# Altium PCB MultiSpikeHoldPCB2.PcbDoc
Units mm, origin at the board's own origin, x right, y up, seen from the top; angles counter-clockwise.
Board outline 89.1 x 92.94 mm, 2 copper layers (Top Layer, Bottom Layer), stack 0.071 mm thick; 1 components, 41 nets, 104 pads, 4 vias.
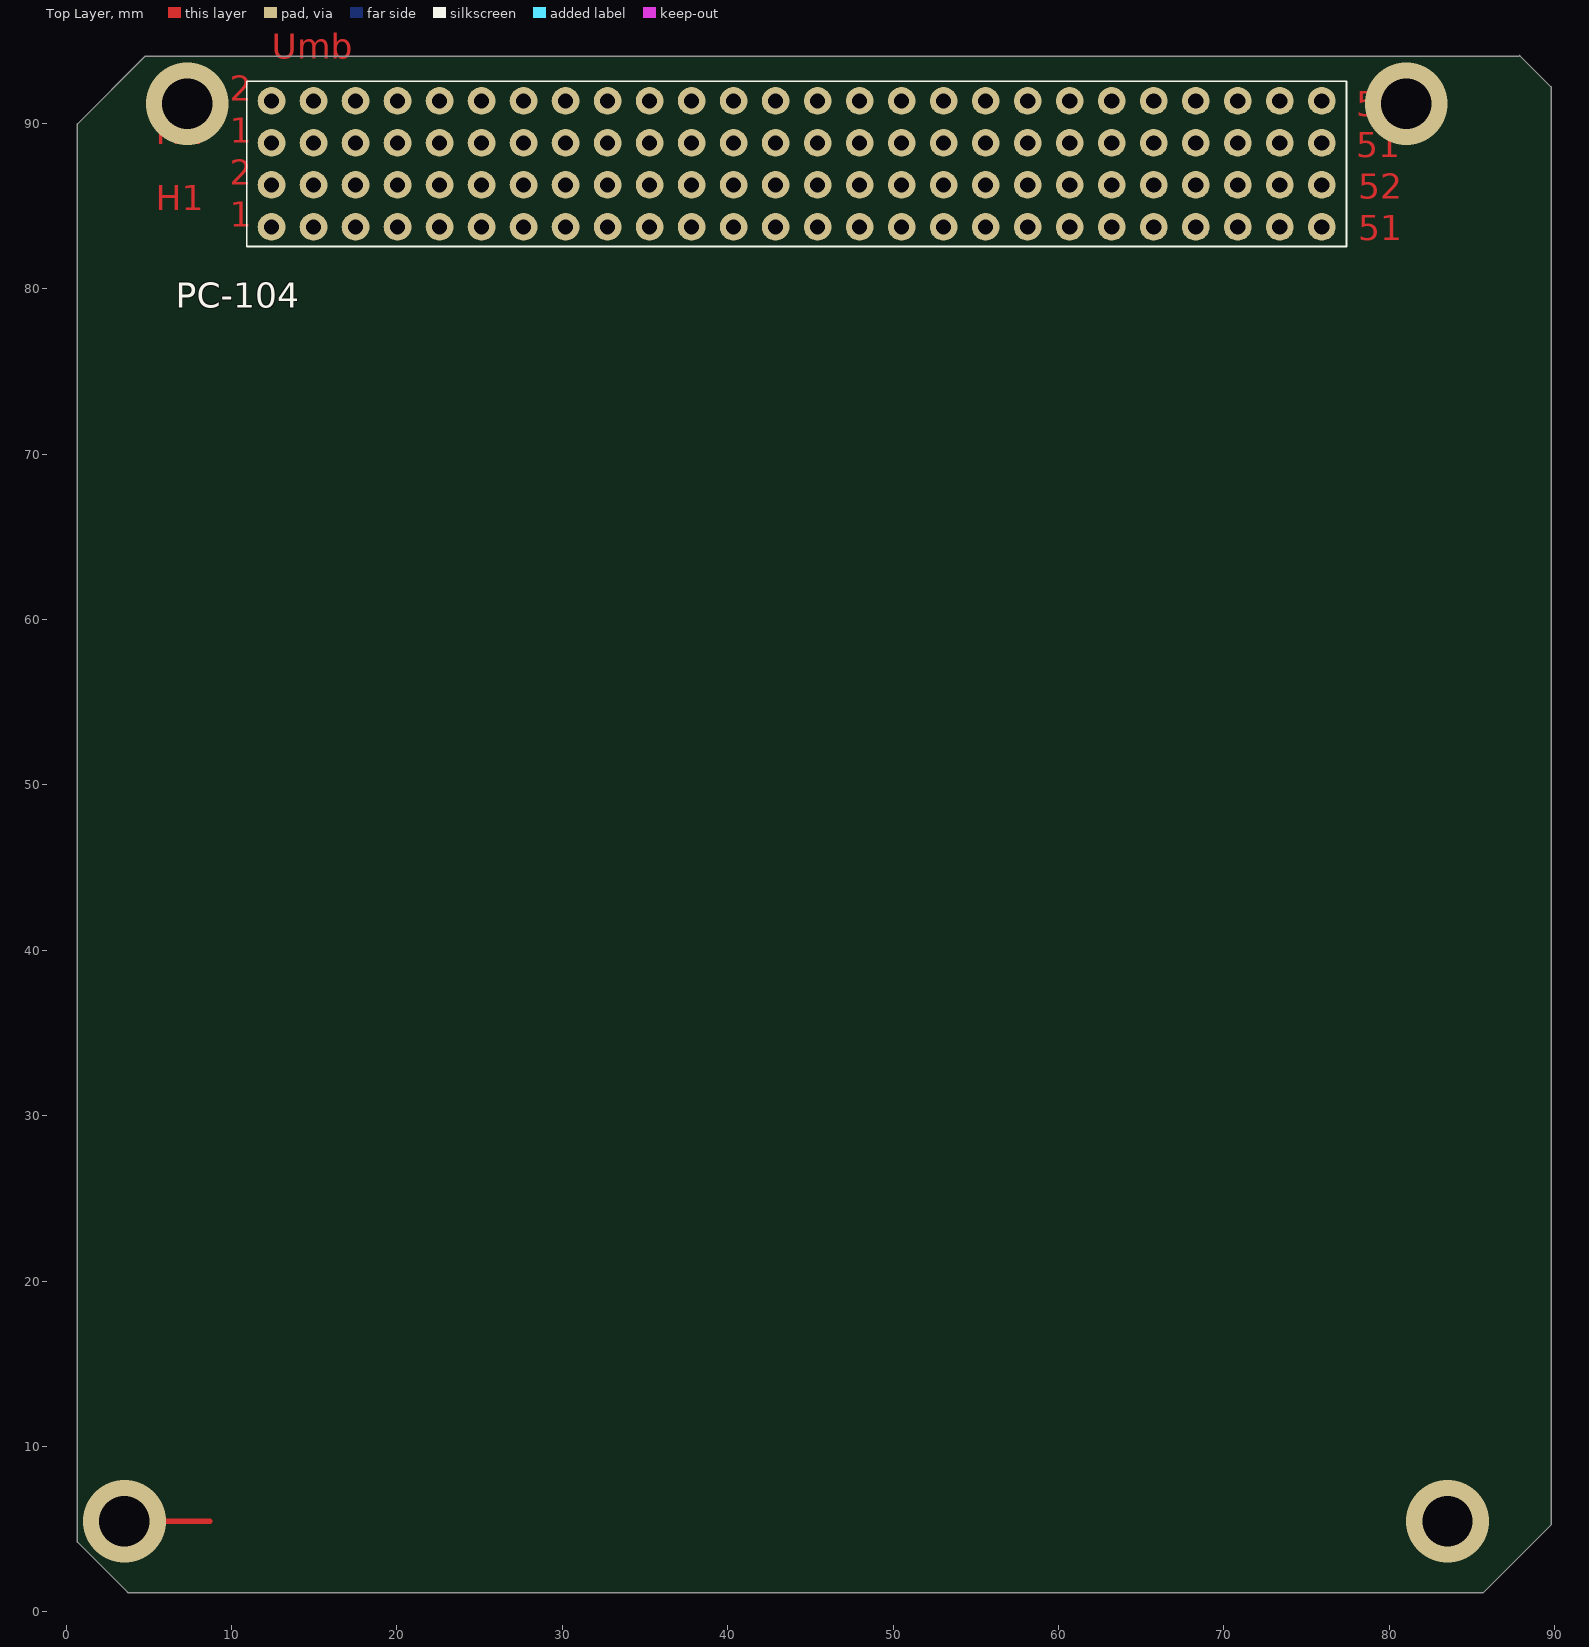
[diagram p0: Top Layer view]
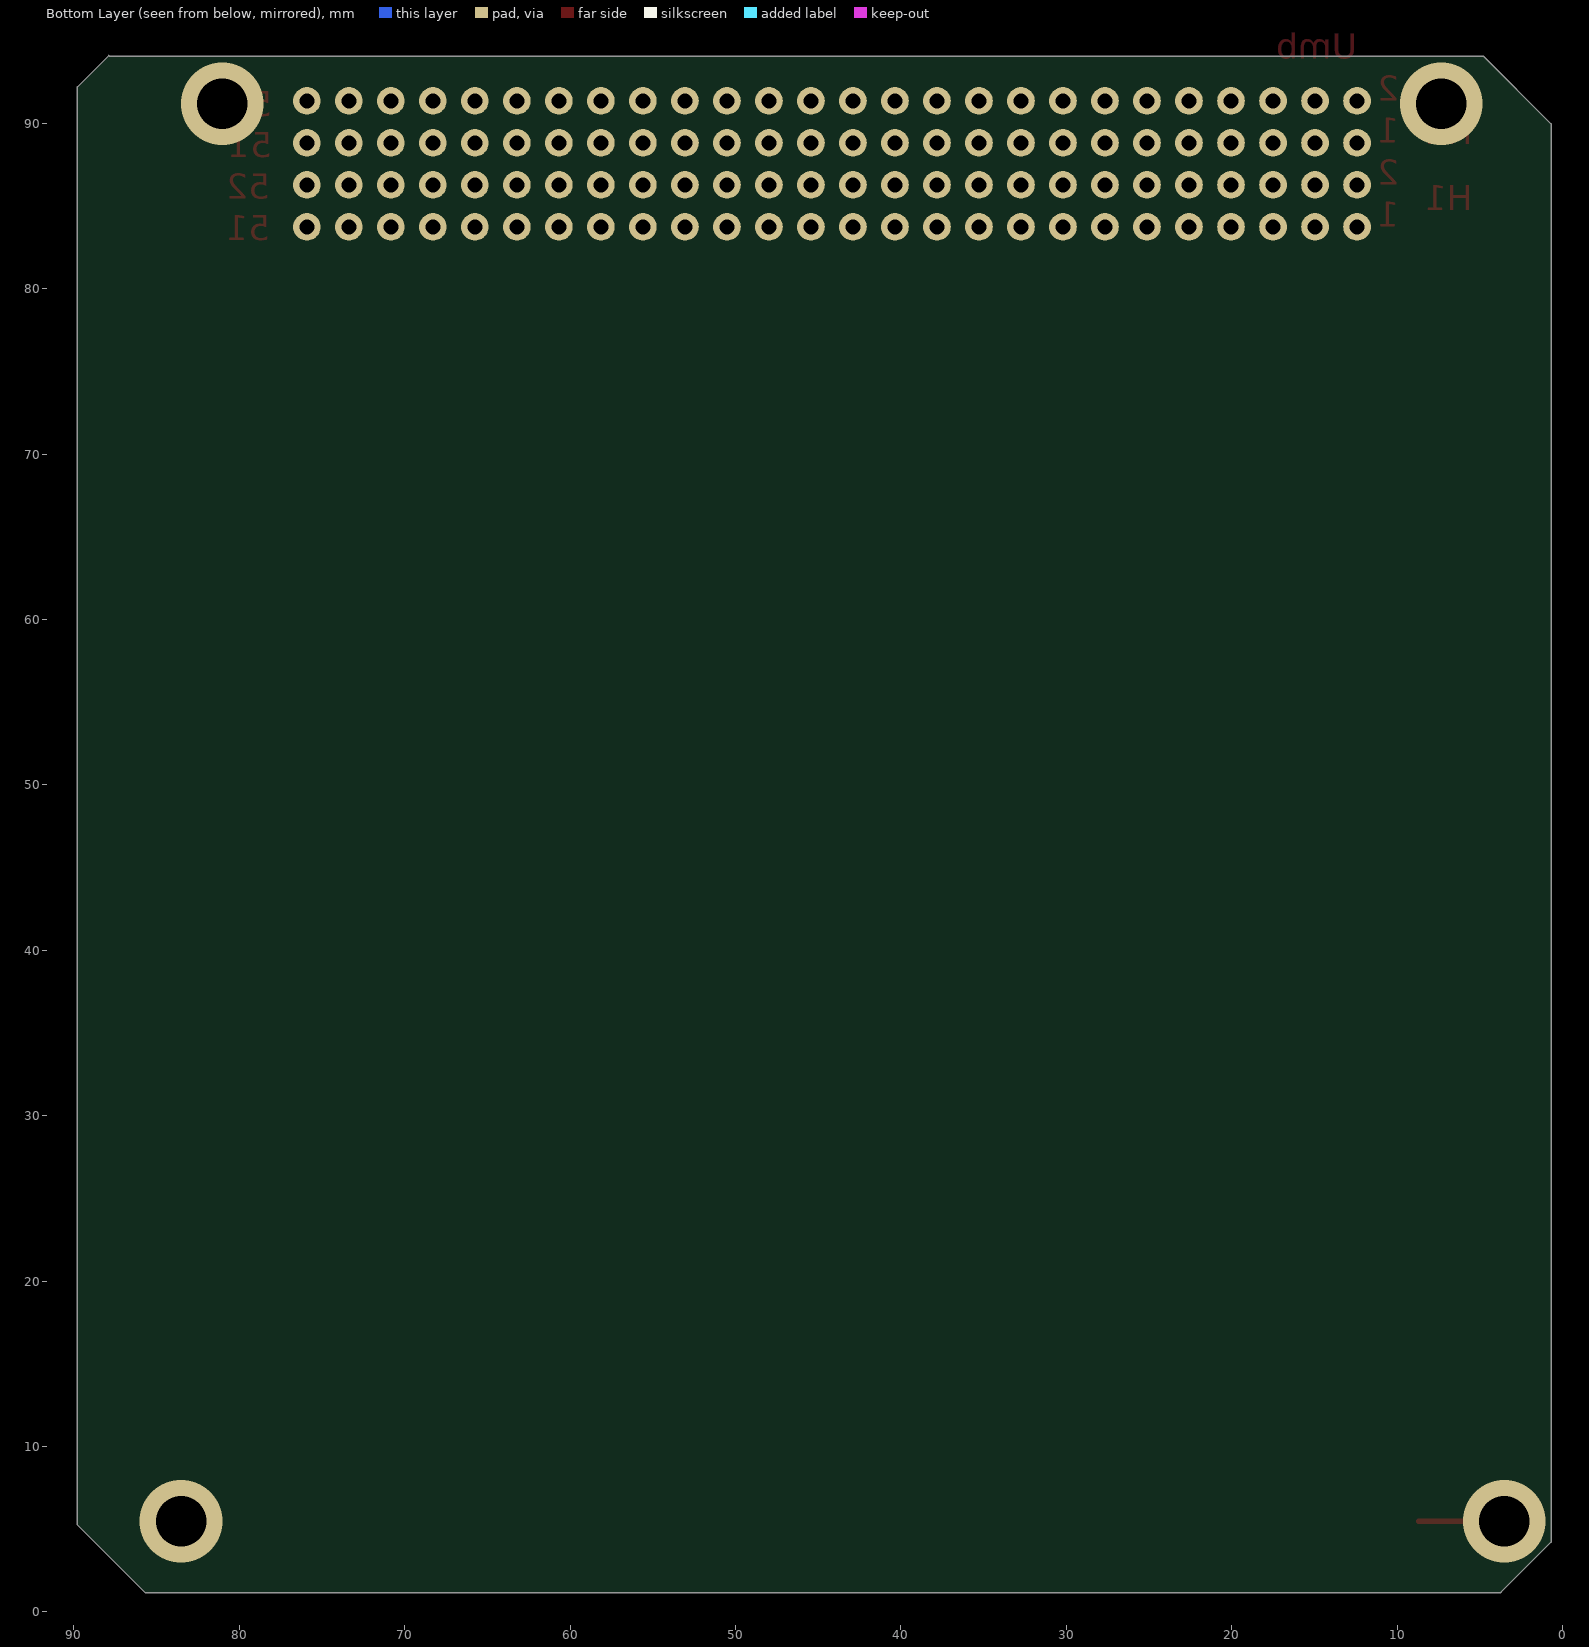
[diagram p1: Bottom Layer view, seen from below]

## Layer stack, top to bottom
Top Solder: solder mask 0.0102, Solder Resist, Dk 3.5
Top Layer: signal copper 0.0356
Bottom Layer: signal copper 0.0356
Bottom Solder: solder mask 0.0102, Solder Resist, Dk 3.5

## Board outline
4.775,94.056 0.686,89.967 0.686,4.216 3.708,1.194 3.734,1.168 84.506,1.168 85.7,1.168 89.789,5.258 89.789,91.821 89.789,92.202 87.884,94.107 87.833,94.056 4.801,94.056

## Design rules (kind name [scope] priority, off if disabled: settings)
Clearance [All] p1: gap=0.254 ignorepadtopadclearanceinfootprint=FALSE except(0: Arc-Hole Track-Hole SMDPad-Hole THPad-Hole Via-Hole Fill-Hole Poly-Hole Region-Hole Text-Hole; 0.127: Track-Track Track-SMDPad Track-THPad SMDPad-SMDPad SMDPad-THPad THPad-THPad)
HoleSize [All] p1: absolutevalues=TRUE maxlimit=3.048 minlimit=0.025 maxpercent=80.000 minpercent=20.000
MinimumSolderMaskSliver [All] p1: minsoldermaskwidth=0.127
PlaneConnect [All] p1: planeconnectstyle=Direct reliefexpansion=0.508 reliefentries=4 reliefconductorwidth=0.254 reliefairgap=0.254
PolygonConnect [All] p1: connectstyle=Direct reliefconductorwidth=0.254 reliefentries=4 polygonreliefangle="90 Angle" airgapwidth=0.254
RoutingVias [All] p1: holewidth=0.711 width=1.27 viastyle="Through Hole" minholewidth=0.711 minwidth=1.27 maxholewidth=0.711 maxwidth=1.27
SolderMaskExpansion [All] p1: expansion=0.102
Width [All] p1: maxlimit=0.559 minlimit=0.305 preferedwidth=0.33
27 further rules are at their usual default settings.

## Components (designator, comment, footprint, x,y, rotation, side; value= is the part's Value field where it differs from the comment)
PC-104 "PC-104" PC-104FOOTPRINT 12.421,83.744 r0 top

## Footprints (in the part's own frame and the unit in brackets; to place one, negate y for a bottom-side part, rotate by r counter-clockwise, add the part's x,y. Pads: shape width x height; smd on the part's side, far side on the other; paste and mask are expansions set on the pad)
PC-104FOOTPRINT [mm]
  round 1.676 hole 0.914 mask+0.076: H1_1(0,0) H1_2(0,2.54) H1_3(2.54,0) H1_4(2.54,2.54) H1_5(5.08,0) H1_6(5.08,2.54) H1_7(7.62,0) H1_8(7.62,2.54) H1_9(10.16,0) H1_10(10.16,2.54) H1_11(12.7,0) H1_12(12.7,2.54) H1_13(15.24,0) H1_14(15.24,2.54) H1_15(17.78,0) H1_16(17.78,2.54) H1_17(20.32,0) H1_18(20.32,2.54) H1_19(22.86,0) H1_20(22.86,2.54) H1_21(25.4,0) H1_22(25.4,2.54) H1_23(27.94,0) H1_24(27.94,2.54) H1_25(30.48,0) H1_26(30.48,2.54) H1_27(33.02,0) H1_28(33.02,2.54) H1_29(35.56,0) H1_30(35.56,2.54) H1_31(38.1,0) H1_32(38.1,2.54) H1_33(40.64,0) H1_34(40.64,2.54) H1_35(43.18,0) H1_36(43.18,2.54) H1_37(45.72,0) H1_38(45.72,2.54) H1_39(48.26,0) H1_40(48.26,2.54) H1_41(50.8,0) H1_42(50.8,2.54) H1_43(53.34,0) H1_44(53.34,2.54) H1_45(55.88,0) H1_46(55.88,2.54) H1_47(58.42,0) H1_48(58.42,2.54) H1_49(60.96,0) H1_50(60.96,2.54) H1_51(63.5,0) H1_52(63.5,2.54) H2_1(0,5.08) H2_2(0,7.62) H2_3(2.54,5.08) H2_4(2.54,7.62) H2_5(5.08,5.08) H2_6(5.08,7.62) H2_7(7.62,5.08) H2_8(7.62,7.62) H2_9(10.16,5.08) H2_10(10.16,7.62) H2_11(12.7,5.08) H2_12(12.7,7.62) H2_13(15.24,5.08) H2_14(15.24,7.62) H2_15(17.78,5.08) H2_16(17.78,7.62) H2_17(20.32,5.08) H2_18(20.32,7.62) H2_19(22.86,5.08) H2_20(22.86,7.62) H2_21(25.4,5.08) H2_22(25.4,7.62) H2_23(27.94,5.08) H2_24(27.94,7.62) H2_25(30.48,5.08) H2_26(30.48,7.62) H2_27(33.02,5.08) H2_28(33.02,7.62) H2_29(35.56,5.08) H2_30(35.56,7.62) H2_31(38.1,5.08) H2_32(38.1,7.62) H2_33(40.64,5.08) H2_34(40.64,7.62) H2_35(43.18,5.08) H2_36(43.18,7.62) H2_37(45.72,5.08) H2_38(45.72,7.62) H2_39(48.26,5.08) H2_40(48.26,7.62) H2_41(50.8,5.08) H2_42(50.8,7.62) H2_43(53.34,5.08) H2_44(53.34,7.62) H2_45(55.88,5.08) H2_46(55.88,7.62) H2_47(58.42,5.08) H2_48(58.42,7.62) H2_49(60.96,5.08) H2_50(60.96,7.62) H2_51(63.5,5.08) H2_52(63.5,7.62)
  silkscreen extent -1.5,-1.19 65,8.81

## Via types
v1: diameter 5, hole 3.048, Top Layer to Bottom Layer, 4 vias

## Nets (pads, with @x,y where several pads share a name; then routed paths per layer and width w, separated by ;. In a path a pad name is that pad's centre, name@x,y a point inside that pad or via, vN(x,y) a via of type N, cw(c..) or ccw(c..) an arc to the next point about the centre after c; other vN are vias at no path point)
GOM_GND_1: PC-104.H2_29
Net5Vto24V_1_3: 
Net5Vto24V_2_3: 
Net5Vto24V_3_3: 
NetPC-?_H1_5: PC-104.H1_5
NetPC-?_H1_7: PC-104.H1_7
NetPC-?_H1_9: PC-104.H1_9
NetPC-?_H1_11: PC-104.H1_11
NetPC-?_H1_13: PC-104.H1_13
NetPC-?_H1_15: PC-104.H1_15
NetPC-?_H1_17: PC-104.H1_17
NetPC-?_H1_19: PC-104.H1_19
NetPC-?_H1_20: PC-104.H1_20
NetPC-?_H1_24: PC-104.H1_24
NetPC-?_H1_25: PC-104.H1_25
NetPC-?_H1_26: PC-104.H1_26
NetPC-?_H1_27: PC-104.H1_27
NetPC-?_H1_30: PC-104.H1_30
NetPC-?_H1_32: PC-104.H1_32
NetPC-?_H1_39: PC-104.H1_39
NetPC-?_H1_41: PC-104.H1_41
NetPC-?_H1_43: PC-104.H1_43
NetPC-?_H1_47: PC-104.H1_47
NetPC-?_H1_48: PC-104.H1_48
NetPC-?_H1_49: PC-104.H1_49
NetPC-?_H1_50: PC-104.H1_50
NetPC-?_H1_51: PC-104.H1_51
NetPC-?_H1_52: PC-104.H1_52
NetPC-?_H2_13: PC-104.H2_13
NetPC-?_H2_14: PC-104.H2_14
NetPC-?_H2_15: PC-104.H2_15
NetPC-?_H2_16: PC-104.H2_16
NetPC-?_H2_17: PC-104.H2_17
NetPC-?_H2_19: PC-104.H2_19
NetPC-?_H2_25: PC-104.H2_25
NetPC-?_H2_26: PC-104.H2_26
NetPC-?_H2_27: PC-104.H2_27
NetPC-?_H2_28: PC-104.H2_28
NetPC-?_H2_31: PC-104.H2_31
NetPC-?_H2_45: PC-104.H2_45
V_BAT_1: PC-104.H2_46
pads on no net: PC-104.H1_1 PC-104.H1_2 PC-104.H1_3 PC-104.H1_4 PC-104.H1_6 PC-104.H1_8 PC-104.H1_10 PC-104.H1_12 PC-104.H1_14 PC-104.H1_16 PC-104.H1_18 PC-104.H1_21 PC-104.H1_22 PC-104.H1_23 PC-104.H1_28 PC-104.H1_29 PC-104.H1_31 PC-104.H1_33 PC-104.H1_34 PC-104.H1_35 PC-104.H1_36 PC-104.H1_37 PC-104.H1_38 PC-104.H1_40 PC-104.H1_42 PC-104.H1_44 PC-104.H1_45 PC-104.H1_46 PC-104.H2_1 PC-104.H2_2 PC-104.H2_3 PC-104.H2_4 PC-104.H2_5 PC-104.H2_6 PC-104.H2_7 PC-104.H2_8 PC-104.H2_9 PC-104.H2_10 PC-104.H2_11 PC-104.H2_12 PC-104.H2_18 PC-104.H2_20 PC-104.H2_21 PC-104.H2_22 PC-104.H2_23 PC-104.H2_24 PC-104.H2_30 PC-104.H2_32 PC-104.H2_33 PC-104.H2_34 PC-104.H2_35 PC-104.H2_36 PC-104.H2_37 PC-104.H2_38 PC-104.H2_39 PC-104.H2_40 PC-104.H2_41 PC-104.H2_42 PC-104.H2_43 PC-104.H2_44 PC-104.H2_47 PC-104.H2_48 PC-104.H2_49 PC-104.H2_50 PC-104.H2_51 PC-104.H2_52
copper on no net: | length 5.2
  Top Layer w0.33: v1(3.526,5.479) 8.679,5.479
  other v1: 83.526,5.479 7.326,91.179 81.026,91.179

## Silkscreen, mask and mechanical layers (free items; w line width, h text height)
Mechanical 2:
  lines w0.762: 0.305,4.216 ccw(c0.686,4.216) 0.416,3.947 ; 0.305,4.216 ccw(c0.686,4.216) 0.417,3.947 ; 0.305,4.216 0.305,89.967 ; 0.305,89.967 cw(c0.686,89.967) 0.417,90.237 ; 0.305,89.967 cw(c0.686,89.967) 0.416,90.236 0.417,90.237 ; 0.416,3.947 0.417,3.947 ; 0.417,3.947 3.439,0.925 ; 0.417,90.237 4.505,94.325 ; 3.439,0.924 ccw(c3.708,1.194) 3.439,0.924 ; 3.439,0.925 ccw(c3.708,1.194) 3.439,0.924 ; 3.439,0.925 3.439,0.924 ; 3.439,0.924 3.439,0.924 ; 3.439,0.924 3.464,0.899 ; 3.464,0.899 ccw(c3.734,1.168) 3.734,0.787 ; 3.464,0.899 ccw(c3.734,1.168) 3.734,0.787 ; 3.464,0.899 3.464,0.899 ; 3.734,0.787 84.506,0.787 85.7,0.787 ; 4.506,94.326 cw(c4.775,94.056) 4.775,94.437 ; 4.505,94.325 cw(c4.775,94.056) 4.775,94.437 ; 4.505,94.325 4.506,94.326 ; 4.775,94.437 4.801,94.437 87.694,94.437 ; 85.7,0.787 ccw(c85.7,1.168) 85.969,0.899 85.969,0.899 ; 85.7,0.787 ccw(c85.7,1.168) 85.969,0.899 ; 85.969,0.899 90.058,4.988 ; 87.694,94.437 cw(c87.884,94.107) 88.154,94.376 ; 87.694,94.437 cw(c87.884,94.107) 88.153,94.376 88.154,94.376 ; 88.154,94.376 90.058,92.472 ; 90.058,4.988 ccw(c89.789,5.258) 90.17,5.258 ; 90.058,4.988 ccw(c89.789,5.258) 90.17,5.258 ; 90.058,4.988 90.058,4.988 ; 90.058,92.472 cw(c89.789,92.202) 90.17,92.202 ; 90.058,92.472 90.058,92.471 cw(c89.789,92.202) 90.17,92.202 ; 90.17,5.258 90.17,91.821 90.17,92.202
Drill Drawing:
  text ".Legend" at 69.215,5.944 h1.52

## Dimensions
0.417,90.237 to 90.17,92.202 on Dimensions

## Text inside footprints (layer, text, board x,y; h text height)
PC-104: Top Layer "52" at 78.021,90.444 h1.52; Top Layer "51" at 78.021,87.944 h1.52; Top Layer "52" at 78.121,85.444 h1.52; Top Layer "51" at 78.121,82.944 h1.52; Top Layer "2" at 9.881,91.364 h1.52; Top Layer "1" at 9.881,88.824 h1.52; Top Layer "2" at 9.881,86.284 h1.52; Top Layer "1" at 9.881,83.744 h1.52; Top Layer "H2" at 5.421,88.744 h1.52; Top Layer "H1" at 5.421,84.744 h1.52; Top Layer "Umb" at 12.421,93.904 h1.52; Mechanical 1 "J1" at 51.828,87.638 h0.76